# Altium PCB A13-OLinuXino-MICRO_Rev_B_saved.PcbDoc (part 3 of 4)
Units mil, origin at the board's own origin, x right, y up, seen from the top; angles counter-clockwise.
Board outline 3950 x 3350 mil, 4 copper layers (Top, Route2, Route15, Bottom), stack 64.567 mil thick; 262 components, 264 nets, 1099 pads, 476 vias.
Unrouted connection lines stored in the file: 19.
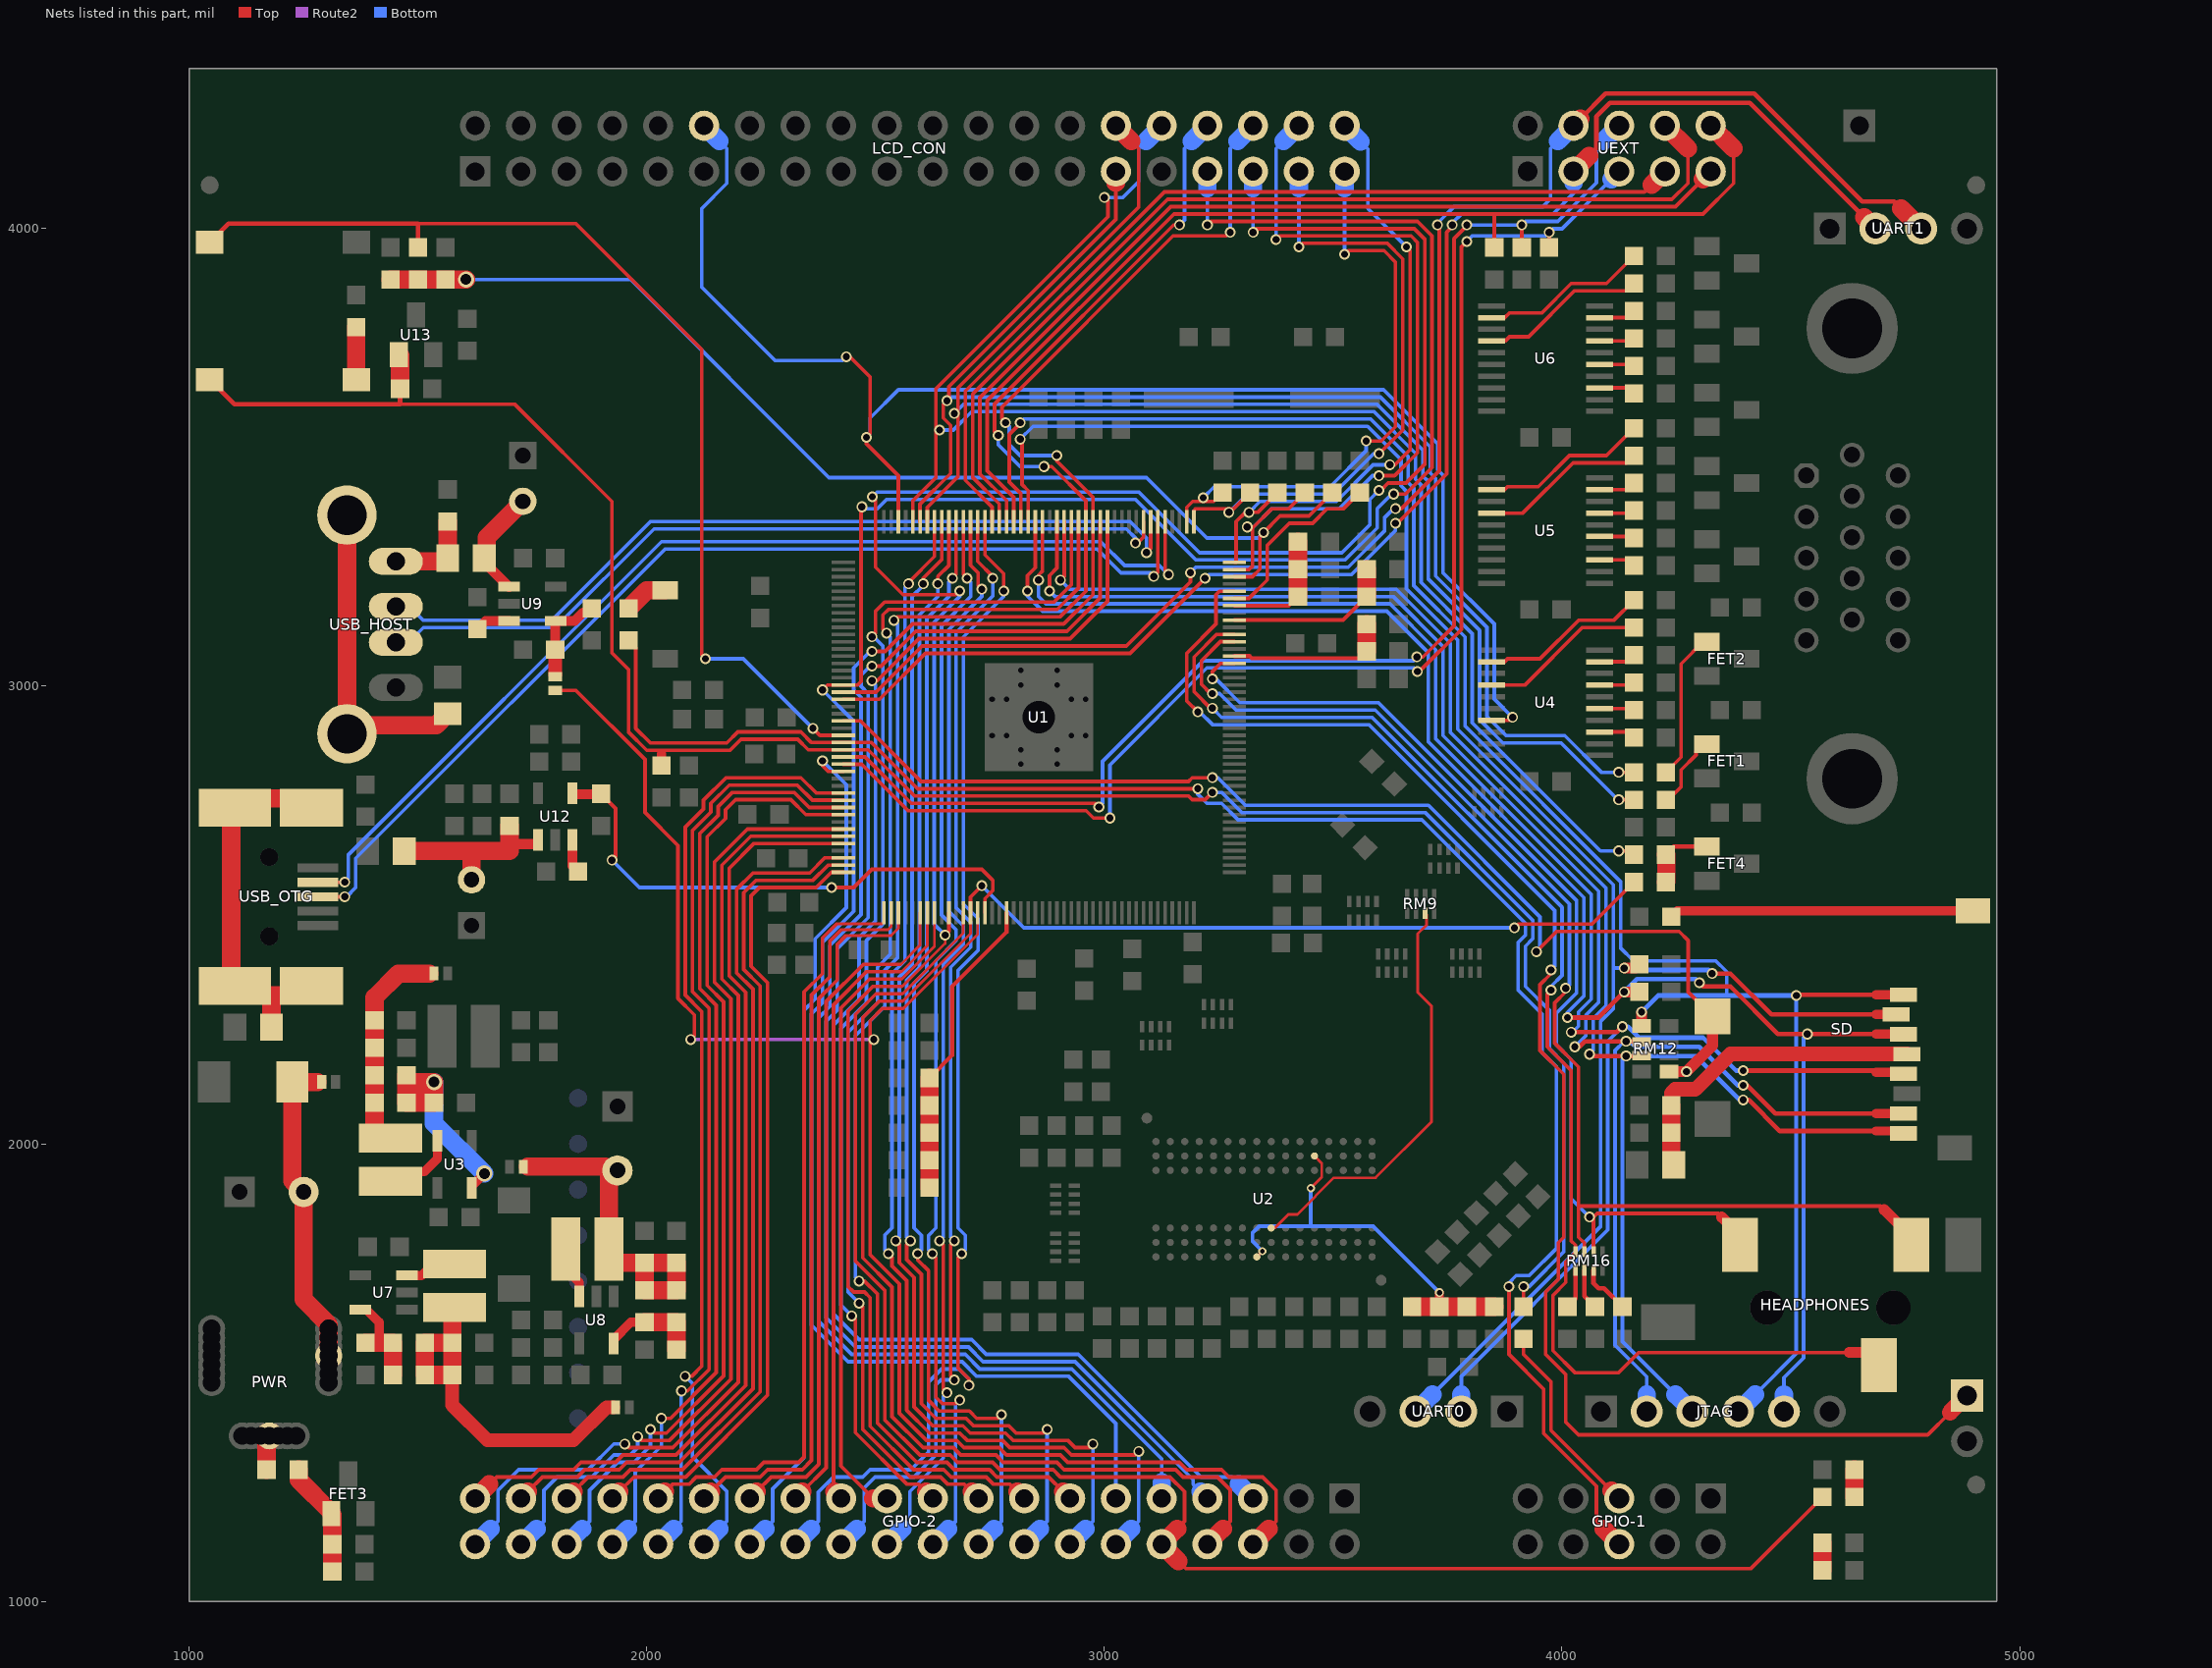
[diagram p5: the nets of this part, all layers, seen from the top]

## Via types
v1: diameter 23.75/23.75/23.75/23.75 (per signal layer), hole 15.75, Top to Bottom, 263 vias
v2: diameter 35.43/31.62/31.62/35.43 (per signal layer), hole 23.62, Top to Bottom, 120 vias
v3: diameter 19.81/19.81/19.81/19.81 (per signal layer), hole 11.81, Top to Bottom, 48 vias
v4: diameter 18/18/18/18 (per signal layer), hole 10, Top to Bottom, 41 vias
v5: diameter 169.92/137.92/137.92/169.92 (per signal layer), hole 129.92, Top to Bottom, 4 vias

## Nets (pads, with @x,y where several pads share a name; then routed paths per layer and width w, separated by ;. In a path a pad name is that pad's centre, name@x,y a point inside that pad or via, vN(x,y) a via of type N, cw(c..) or ccw(c..) an arc to the next point about the centre after c; other vN are vias at no path point) (continued)
LCD_D23: LCD_CON.12 U1.130 U4.17 | length 3276
  Top w8: v1(2436,3720) 2444,3720 2488,3676 2488,3552 v1(2480,3544) 2480,3530 2549.91,3460.09 U1.130@2549.91,3359.17 ; U4.17@3845.89,2925.61 3885.61,2925.61 v1(3892,2932)
  Bottom w8: 2159,4191 2175,4175 2175,4099 2120,4044 2120,3872 2280,3712 2428,3712 v1(2436,3720) ; v1(2480,3544) 2488,3552 2488,3586 2550,3648 3610,3648 3728,3530 3728,3473 3740,3461 3740,3248 3852,3136 3852,2972 v1(3892,2932)
  Bottom w40: LCD_CON.12@2125,4225 2159,4191
LCD_DE: LCD_CON.32 R72.2 U1.128 | length 3336
  Top w8: U1.128@2581.41,3359.17 2581.41,3405.41 2632,3456 v1@2632,3560 ; v1(2640,3560) v1@2632,3560 ; v1(3000,4068) 3008,4060 3008,4026 2632,3650 v1@2632,3560 ; v1(4124,2640) 4149,2640 R72.2@4157,2632
  Bottom w8: v1(2640,3560) 2670,3560 2710,3600 3589,3600 3680,3509 3680,3452 3692,3440 3692,3227 3804,3115 3804,2920 4084,2640 v1(4124,2640) ; v1(3000,4068) 3040,4068 3075,4103 3075,4175 3091,4191
  Bottom w40: 3091,4191 LCD_CON.32@3125,4225
LCD_HSYNC: LCD_CON.29 R6.1 U1.127 | length 3072.7
  Top w8: U1.127@2597.16,3359.17 2597.16,3398.16 2664,3465 2664,3570 2648,3586 2648,3616 v1(2656,3624) 2660,3628 2660,3655 3025,4020 LCD_CON.29@3025,4100 ; v1(4124,2812) R6.1@4157,2812
  Top w40: LCD_CON.29@3025,4100 LCD_CON.29@3025,4125
  Bottom w8: v1(2656,3624) 2664,3632 3603,3632 3712,3523 3712,3466 3724,3454 3724,3241 3836,3129 3836,2934 3878,2892 4006,2892 4086,2812 v1(4124,2812)
LCD_VSYNC: LCD_CON.30 R5.1 U1.126 | length 3209.5
  Top w8: U1.126@2612.91,3359.17 2612.91,3390.91 2680,3458 v1@2680,3596 ; v1(2672,3596) v1@2680,3596 ; 3059,4191 3075,4175 3075,4047 2680,3652 v1@2680,3596 ; v1(4124,2752) R5.1@4157,2752
  Top w40: LCD_CON.30@3025,4225 3059,4191
  Bottom w8: v1(2672,3596) 2692,3616 3596,3616 3696,3516 3696,3459 3708,3447 3708,3234 3820,3122 3820,2927 3871,2876 3998,2876 4122,2752 v1(4124,2752)
LRADC: C64.2 C103.1 R53.2 R55.1 U1.86 | length 2479.2
  Top w8: U1.86@3284.17,3239.09 3323.09,3239.09 3340,3256 3340,3328 v1(3348,3336) 3384,3372 3447,3372 C64.2@3498,3423
  Top w40: C103.1@1440,3889 R55.1@1500,3889 R53.2@1560,3889 v2(1605,3889)
  Bottom w8: v2(1605,3889) 1965,3889 2398,3456 3092,3456 3224,3324 3336,3324 v1(3348,3336)
MICIN1: MIC.1 U1.84 | length 3407.3
  Top w8: v1(3204,2944) 3180,2968 3180,3072 3244,3136 3244,3200 3251.59,3207.59 U1.84@3284.17,3207.59 ; v1(3976,2380) 3976,2372 3952,2348 3952,2204 4004,2152 4004,1796 3992,1784 3992,1704 3964,1676 3964,1540 4008,1496 4008,1392 4036,1364 4799,1364 4848,1413
  Top w36: 4848,1413 MIC.1@4885,1450
  Bottom w8: v1(3204,2944) 3208,2944 3236,2916 3578,2916 3984,2510 3984,2388 v1(3976,2380)
N$1: C62.2 C63.2 U1.75 | length 357.1
  Top w9: U1.75@3284.17,3065.86 3317.14,3065.86 3322,3061 3558,3061 C63.2@3573,3076
  Top w40: C63.2@3573,3076 C62.2@3573,3136
N$2: FET4.1 R72.1 R73.1 | length 158.3
  Top w10: R72.1@4227,2632 4244.4,2649.4 FET4.1@4316.69,2649.4
  Top w40: R73.1@4227,2572 4228,2573 4228,2632 R72.1@4227,2632
N$3: 5V_E.1 C102.+ D8.C PWR.+ | length 695.1
  Top w20: 5V_E.1@1280,2135 5V_E.1@1290,2135
  Top w40: 5V_E.1@1280,2135 D8.C@1225.71,2135 1225.71,1919.29 C102.+@1250,1895 1250,1660 1305,1605 PWR.+@1305,1537.01
N$4: L2.1 U3.3 | length 165.6
  Top w20: L2.1@1440,1917.76 1461.24,1939 1514,1939 1542.6,1967.6 U3.3@1542.6,2006.19 U3.3@1542.6,2010
N$6: R56.1 SD.12 | length 664.2
  Top w20: R56.1@4239,2496 4252.06,2509.06 SD.12@4897.83,2509.06
N$7: C57.2 FET3.1 R43.1 R45.2 | length 253.5
  Top w40: R45.2@1239.19,1287.94 1239.19,1265.81 1310.6,1194.4 FET3.1@1310.6,1191.69 1313,1189.29 R43.1@1313,1125 C57.2@1313,1065
N$8: L4.1 U7.3 | length 114.1
  Top w20: U7.3@1476.19,1712.4 1507.4,1712.4 1532.24,1737.24 L4.1@1580,1737.24
N$9: C36.2 C37.2 U1.80 | length 370.1
  Top w8: U1.80@3284.17,3144.6 3521.6,3144.6 C36.2@3573,3196
  Top w40: C36.2@3573,3196 C37.2@3573,3256
N$10: D1.C R3.2 | length 96.5
  Top w40: R3.2@1960,3170 1999.8,3209.8 D1.C@2040,3209.8
N$11: PWR.-- R45.1 | length 79.8
  Top w40: R45.1@1169.19,1287.94 1169.19,1361.81 PWR.--@1175.08,1361.81
N$12: FET1.1 R5.2 | length 166.3
  Top w8: R5.2@4227,2752 4232,2752 4260,2780 4260,2817 4293,2850 4293,2858 4308.4,2873.4 FET1.1@4316.69,2873.4
N$13: C38.2 U1.83 | length 414.1
  Top w8: U1.83@3284.17,3191.84 3315.84,3191.84 3356,3232 3356,3308 3404,3356 3455,3356 3487,3388 3523,3388 C38.2@3558,3423
N$14: C39.2 C40.2 R4.1 U1.82 | length 267.1
  Top w8: U1.82@3284.17,3176.09 3403.09,3176.09 C40.2@3423,3196
  Top w40: C40.2@3423,3196 C39.2@3423,3256 R4.1@3423,3316
N$15: FET2.1 R6.2 | length 327.4
  Top w8: R6.2@4227,2812 4260,2845 4260,3049 4308.4,3097.4 FET2.1@4316.69,3097.4
N$16: C101.+ L7.2 R57.2 U12.1 | length 419.4
  Top w22: 1700,2655 1762.6,2655 U12.1@1762.6,2663.81
  Top w40: L7.2@1470,2640 1617,2640 ; C101.+@1617,2577 1617,2640 ; R57.2@1700,2695 1700,2655 1700,2640 1617,2640
N$18: 1.5V_E.1 C81.1 C82.1 C83.1 L4.2 R37.1 | length 824.5
  Top w20: 1.5V_E.1@1927,1424 1.5V_E.1@1932,1424
  Top w30: C82.1@1575,1495 1575,1429 1652,1352 1840,1352 1912,1424 1.5V_E.1@1927,1424
  Top w40: L4.2@1580,1642.76 1575,1637.76 C83.1@1575,1565 ; C83.1@1575,1565 C82.1@1575,1495 C81.1@1515,1495 R37.1@1515,1565 C83.1@1575,1565
N$19: C81.2 R37.2 R41.1 U7.5 | length 227.6
  Top w20: U7.5@1373.81,1637.6 1387.4,1637.6 1415,1610 1415,1565
  Top w40: R41.1@1385,1565 1415,1565 R37.2@1445,1565 C81.2@1445,1495
N$20: R33.1 U6.5 | length 76.2
  Top w8: U6.5@4082.11,3703.2 4153.8,3703.2 R33.1@4157,3700
N$22: L6.2 USB_HOST.P$1 USB_HOST.P$2 | length 727.3
  Top w40: USB_HOST.P$2@1345,3373.98 USB_HOST.P$1@1345,2896.02 1345,2915 1540,2915 L6.2@1565,2940
N$23: 1.2V_E.1 C75.1 C76.1 C77.1 L2.2 R17.1 | length 494.3
  Top w20: 1.2V_E.1@1525,2372 1.2V_E.1@1535,2372
  Top w40: L2.2@1440,2012.24 1405,2012.24 R17.1@1405,2090 C75.1@1405,2150 C76.1@1405,2210 C77.1@1405,2270 1405,2320 1457,2372 1.2V_E.1@1525,2372
N$24: HOST_EN.2 R60.2 R61.2 U9.4 | length 212.9
  Top w20: HOST_EN.2@1800,3021 HOST_EN.2@1800,3026
  Top w22: R61.2@1800,3080 1800,3142.6 U9.4@1801.19,3142.6 1842.6,3142.6 1861,3161 1871,3161 R60.2@1880,3170
  Top w30: HOST_EN.2@1800,3026 R61.2@1800,3080
N$26: HEADPHONES.2 RM16.3.2 U1.74 | length 2256
  Top w8: v1(3236,3016) 3236,3032 3254.11,3050.11 U1.74@3284.17,3050.11 ; v1(4060,1840) v1@4068.84,1840 ; RM16.3.2@4068.84,1764.18 v1@4068.84,1840 ; 4349,1840 4341,1848 4076.84,1848 v1@4068.84,1840 ; HEADPHONES.2@4389.13,1779.69 HEADPHONES.2@4389.13,1799.87
  Top w24: 4349,1840 HEADPHONES.2@4389.13,1799.87
  Bottom w8: v1(3236,3016) 3244,3016 3296,2964 3599,2964 4032,2531 4032,2330 3988,2286 3988,2216 4020,2184 4020,1880 v1(4060,1840)
N$27: HEADPHONES.5 RM16.2.2 U1.77 | length 2716.3
  Top w8: v1(3236,2984) 3232,2984 3212,3004 3212,3056 3253.35,3097.35 U1.77@3284.17,3097.35 ; v1(4008,2340) 4008,2332 3984,2308 3984,2220 4036,2168 4036,1864 ; RM16.2.2@4049.16,1764.18 4049.16,1782.84 4036,1796 4036,1864 ; 4704,1856 4696,1864 4036,1864 ; HEADPHONES.5@4763.15,1779.69 HEADPHONES.5@4763.15,1796.85
  Top w24: 4704,1856 HEADPHONES.5@4763.15,1796.85
  Bottom w8: v1(3236,2984) 3252,2984 3288,2948 3592,2948 4016,2524 4016,2348 v1(4008,2340)
N$28: HEADPHONES.3 RM16.1.2 U1.78 | length 2973.8
  Top w8: v1(3236,2952) 3232,2952 3196,2988 3196,3064 3245.1,3113.1 U1.78@3284.17,3113.1 ; v1(3976,2336) 3968,2328 3968,2212 4020,2160 4020,1788 4029.47,1778.53 RM16.1.2@4029.47,1764.18 4029.47,1763.47 4008,1742 4008,1697 3980,1669 3980,1548 4028,1500 4124,1500 4168,1544 4628,1544 ; HEADPHONES.3@4664.19,1544 HEADPHONES.3@4692.28,1515.91
  Top w24: 4628,1544 HEADPHONES.3@4664.19,1544
  Bottom w8: v1(3236,2952) 3256,2932 3585,2932 4000,2517 4000,2368 3976,2344 v1(3976,2336)
N$34: C66.2 RM16.3.1 | length 113
  Top w10: RM16.3.1@4068.84,1723.82 4068.84,1695.16 4080,1684 4092,1684 C66.2@4132,1644
N$35: C67.2 RM16.2.1 | length 89.3
  Top w10: RM16.2.1@4049.16,1723.82 4049.16,1666.84 C67.2@4072,1644
N$36: GPIO-1.5 R13.2 | length 435.6
  Top w8: R13.2@3916,1574 3916,1540 3976,1480 3976,1374 GPIO-1.5@4108,1242
  Top w40: GPIO-1.5@4108,1242 GPIO-1.5@4125,1225
N$37: C56.2 C60.2 R9.1 R12.2 U2.H1 U2.M8 | length 921.6
  Top w5: 3474.8,1934.68 3474.8,1949.9
  Top w6: U2.H1@3333.08,1753.04 v4(3345.28,1765.24) ; v4(3451,1903) 3474.8,1926.8 3474.8,1934.68 ; U2.M8@3459.07,1973.51 3474.8,1957.77 3474.8,1949.9
  Top w20: C60.2@3732,1644 v3(3732,1675)
  Top w40: R12.2@3672,1644 C60.2@3732,1644 C56.2@3792,1644 R9.1@3852,1644
  Bottom w8: v4(3345.28,1765.24) 3324,1786.53 3324,1806 3338,1820 3451,1820 ; v4(3451,1903) 3451,1820 ; v3(3732,1675) 3587,1820 3451,1820
N$38: C75.2 R17.2 R21.1 U3.5 | length 573.2
  Top w20: U3.5@1617.4,1903.81 1617.4,1907.4 v2(1645,1935)
  Top w40: C75.2@1475,2150 C75.2@1475,2135 ; 1475,2110 R17.2@1475,2090 R21.1@1535,2090 1535,2110 ; 1475,2110 C75.2@1475,2135 ; 1475,2110 1535,2110 ; C75.2@1475,2135 v2(1535,2135) 1535,2110
  Bottom w40: v2(1535,2135) 1535,2045 v2(1645,1935)
N$42: LED1.C R51.2 | length 60
  Top w40: LED1.C@4639,1228 R51.2@4639,1288
N$44: C68.2 RM16.1.1 | length 87.1
  Top w10: C68.2@4012,1644 4029.47,1661.47 RM16.1.1@4029.47,1723.82
N$46: R52.1 RESET.P$1 | length 115
  Top w40: RESET.P$1@1365,3670 R52.1@1365,3785
N$64: L5.1 U8.3 | length 116.2
  Top w20: L5.1@1822.76,1770 1822.76,1727.24 1852.6,1697.4 U8.3@1852.6,1666.19
N$65: 3.3V_E.1 C54.+ C89.1 C91.1 C92.1 L5.2 R42.1 | length 749.1
  Top w20: 3.3V_E.1@1730,1950 1740,1950
  Top w40: 1740,1950 1909.24,1950 C54.+@1917.24,1942 ; C54.+@1936,1942 C54.+@1917.24,1942 ; C54.+@1917.24,1942 L5.2@1917.24,1770 1917.24,1740 C91.1@1995,1740 ; C91.1@1995,1740 C92.1@2065,1740 C89.1@2065,1680 R42.1@1995,1680 C91.1@1995,1740
N$66: C89.2 R42.2 R46.1 U8.5 | length 221.8
  Top w20: U8.5@1927.4,1563.81 1927.4,1572.4 1965,1610 R42.2@1995,1610
  Top w40: R42.2@1995,1610 C89.2@2065,1610 R46.1@2065,1550
N$99: R68.2 U12.3 | length 74
  Top w22: U12.3@1837.4,2663.81 1837.4,2607.6 R68.2@1850,2595
N$101: R59.2 U9.3 | length 76.1
  Top w22: R59.2@1630,3125 1647.6,3142.6 U9.3@1698.81,3142.6
N$103: R36.1 U6.3 | length 79.9
  Top w8: U6.3@4082.11,3652.02 4144.98,3652.02 R36.1@4157,3640
N$104: R27.1 U6.9 | length 80.9
  Top w8: U6.9@4082.11,3805.57 4142.57,3805.57 R27.1@4157,3820
N$107: R30.1 U6.7 | length 77.2
  Top w8: U6.7@4082.11,3754.39 4151.39,3754.39 R30.1@4157,3760
N$108: R20.1 U6.14 | length 363.1
  Top w8: U6.14@3845.89,3754.39 3875.39,3754.39 3885,3764 3927,3764 4027,3864 4141,3864 R20.1@4157,3880
N$109: R24.1 U6.12 | length 366.8
  Top w8: U6.12@3845.89,3805.57 3874.57,3805.57 3885,3816 3956,3816 4020,3880 4097,3880 R24.1@4157,3940
N$111: C104.1 L9.2 USB_HOST.1 | length 196.3
  Top w40: USB_HOST.1@1451.69,3272.8 1557.8,3272.8 L9.2@1565,3280 C104.1@1565,3360
N$114: C53.+ L9.1 U9.1 | length 243.7
  Top w22: L9.1@1645,3280 1645,3271.22 U9.1@1698.81,3217.4
  Top w40: L9.1@1645,3280 1650,3285 1650,3325 C53.+@1729,3404
N$117: R26.1 U5.9 | length 80.9
  Top w8: U5.9@4082.11,3429.57 4142.57,3429.57 R26.1@4157,3444
N$118: R29.1 U5.7 | length 77.2
  Top w8: U5.7@4082.11,3378.39 4151.39,3378.39 R29.1@4157,3384
N$129: PWR_LED.A R54.2 | length 60
  Top w40: PWR_LED.A@4569,1068 R54.2@4569,1128
N$138: R32.1 U5.5 | length 76.2
  Top w8: U5.5@4082.11,3327.2 4153.8,3327.2 R32.1@4157,3324
N$172: R35.1 U5.3 | length 79.9
  Top w8: U5.3@4082.11,3276.02 4144.98,3276.02 R35.1@4157,3264
N$173: R19.1 U5.14 | length 363.1
  Top w8: U5.14@3845.89,3378.39 3914.39,3378.39 4024,3488 4141,3488 R19.1@4157,3504
N$174: R23.1 U5.12 | length 366.8
  Top w8: U5.12@3845.89,3429.57 3874.57,3429.57 3881,3436 3948,3436 4016,3504 4097,3504 R23.1@4157,3564
N$177: R25.1 U4.9 | length 80.9
  Top w8: U4.9@4082.11,3053.57 4142.57,3053.57 R25.1@4157,3068
N$178: R28.1 U4.7 | length 77.2
  Top w8: U4.7@4082.11,3002.39 4151.39,3002.39 R28.1@4157,3008
N$179: R31.1 U4.5 | length 76.2
  Top w8: U4.5@4082.11,2951.2 4153.8,2951.2 R31.1@4157,2948
N$180: R34.1 U4.3 | length 79.9
  Top w8: U4.3@4082.11,2900.02 4144.98,2900.02 R34.1@4157,2888
N$181: R18.1 U4.14 | length 363.1
  Top w8: U4.14@3845.89,3002.39 3918.39,3002.39 4044,3128 R18.1@4157,3128
N$182: R22.1 U4.12 | length 366.8
  Top w8: U4.12@3845.89,3053.57 3874.57,3053.57 3881,3060 3952,3060 4036,3144 4113,3144 R22.1@4157,3188
N$266: L8.2 USB_OTG.GND1 USB_OTG.GND2 USB_OTG.GND3 USB_OTG.GND4 | length 891.3
  Top w40: L8.2@1180,2255 1180,2325 ; USB_OTG.GND4@1267.52,2345.12 1267.52,2325 1180,2325 ; USB_OTG.GND2@1267.52,2734.88 1267.52,2755 1100.2,2755 USB_OTG.GND1@1100.2,2734.88 1092,2734.88 1092,2345.12 USB_OTG.GND3@1100.2,2345.12 1100.2,2325 1180,2325
NMI_N: GPIO-1.6 R3.1 U1.158 | length 3903.7
  Top w8: R3.1@1960,3100 1976,3084 1976,2908 2008,2876 2175,2876 2199,2900 2337,2900 2360.12,2876.88 U1.158@2429.83,2876.88 2491.12,2876.88 2592,2776 v1(3204,2776) ; v1(3884,1688) 3884,1540 3960,1464 3960,1367 4075,1252 4075,1175 4091,1159
  Top w40: 4091,1159 GPIO-1.6@4125,1125
  Bottom w8: v1(3204,2776) 3204,2764 3224,2744 3256,2744 3292,2708 3694,2708 3920,2482 3920,2456 3904,2440 3904,2336 3956,2284 3956,2200 3988,2168 3988,1772 3928,1712 3900,1712 3884,1696 v1(3884,1688)
PIN4/TWI0-SCK: GPIO-2.5 U1.101 | length 3269.4
  Top w8: v1(2492,3012) 2503,3012 2595,3104 2925,3104 3006.61,3185.61 U1.101@3006.61,3359.17
  Bottom w8: v1(2492,3012) 2500,3004 2500,2487 2464,2451 2464,2316 2408,2260 2408,1628 2464,1572 2710,1572 2742,1540 2943,1540 3211,1272 3278,1272 3294,1256
  Bottom w40: 3294,1256 GPIO-2.5@3325,1225
PIN5/TWI0-SDA: GPIO-2.7 U1.102 | length 3210.3
  Top w8: v1(2492,3044) 2512,3044 2588,3120 2918,3120 2990.86,3192.86 U1.102@2990.86,3359.17
  Bottom w8: v1(2492,3044) 2488,3044 2468,3024 2468,3000 2484,2984 2484,2494 2416,2426 2416,2292 2392,2268 2392,1620 2456,1556 2703,1556 2735,1524 2936,1524 3194,1266 3194,1256 GPIO-2.7@3210,1240
  Bottom w40: GPIO-2.7@3210,1240 GPIO-2.7@3225,1225
PIN6/PWM0: GPIO-2.9 LCD_CON.36 U1.103 | length 4472.6
  Top w8: v1(2492,3076) 2521,3076 2581,3136 2911,3136 2975.11,3200.11 U1.103@2975.11,3359.17 2975.11,3412.89 2896,3492 v1(2896,3504) ; v1(2784,3576) 2776,3584 2776,3610 3150,3984 3267,3984 v1(3275,3992)
  Bottom w8: v1(2492,3076) 2488,3076 2452,3040 2452,2992 2468,2976 2468,2501 2400,2433 2400,2300 2376,2276 2376,1612 2448,1540 2696,1540 2728,1508 2929,1508 3125,1312 3125,1260 ; v1(2784,3576) 2792,3568 2792,3528 2816,3504 v1(2896,3504) ; v1(3275,3992) 3275,4175 3291,4191
  Bottom w40: GPIO-2.9@3125,1225 3125,1260 ; 3291,4191 LCD_CON.36@3325,4225
PIN7: GPIO-2.11 LCD_CON.33 U1.150 | length 5400.4
  Top w8: v1(2384,2992) 2394.87,3002.87 U1.150@2425.5,3002.87 ; U1.150@2429.83,3002.87 U1.150@2425.5,3002.87 ; v1(2470,3392) 2468,3390 2468,3010 2460.87,3002.87 U1.150@2425.5,3002.87 ; v1(3225,4008) 3233,4016 3684,4016 3716,3984 3716,3478 3658,3420 v1(3632,3420)
  Bottom w8: v1(2384,2992) 2452,2924 2452,2508 2384,2440 2384,2308 2360,2284 2360,1604 2440,1524 2689,1524 2721,1492 2922,1492 3025,1389 GPIO-2.11@3025,1225 ; v1(2470,3392) 2474,3388 2504,3388 2524,3408 3068,3408 3200,3276 3526,3276 3596,3346 3596,3388 3628,3420 v1(3632,3420) ; v1(3225,4008) 3225,4088
  Bottom w40: 3225,4088 LCD_CON.33@3225,4125
PIN8: GPIO-2.13 LCD_CON.34 U1.104 | length 4098.1
  Top w8: v1(2464,1700) 2476,1700 2504,1672 2504,1390 2590,1304 2656,1304 2672,1288 2749,1288 2765,1272 2878,1272 GPIO-2.13@2910,1240 ; v1(2540,3144) 2548,3152 2904,3152 2959.36,3207.36 U1.104@2959.36,3359.17 2959.36,3405.64 2885,3480 v1(2868,3480) ; v1(2768,3548) 2760,3556 2760,3617 3151,4008 v1(3164,4008)
  Top w40: GPIO-2.13@2910,1240 GPIO-2.13@2925,1225
  Bottom w8: v1(2464,1700) 2456,1708 2456,2236 2520,2300 2520,2379 2548,2407 2548,3136 v1(2540,3144) ; v1(2768,3548) 2768,3528 2816,3480 v1(2868,3480) ; v1(3164,4008) 3175,4019 3175,4175 3191,4191
  Bottom w40: 3191,4191 LCD_CON.34@3225,4225
PIN9: GPIO-2.15 LCD_CON.35 U1.10 | length 5231.9
  Top w6: 2556.6,2344 2558,2344 2652,2438 v1(2652,2456)
  Top w8: v1(2493,3414) 2500,3407 2500,3260 2560,3200 2676,3200 v1(2684,3208) ; 2556.6,2344 2494,2344 2440,2290 2440,1688 2452,1676 2476,1676 2488,1664 2488,1383 2583,1288 2649,1288 2665,1272 2742,1272 2758,1256 2794,1256 GPIO-2.15@2810,1240 ; v1(2652,2456) 2660.15,2464.15 U1.10@2660.15,2504.83 ; v1(3325,3992) 3333,4000 3677,4000 3700,3977 3700,3485 3659,3444 3620,3444 3604,3428 v1(3600,3428)
  Top w40: GPIO-2.15@2810,1240 GPIO-2.15@2825,1225
  Bottom w8: v1(2493,3414) 2503,3424 3076,3424 3208,3292 3519,3292 3580,3353 3580,3408 v1(3600,3428) ; v1(2652,2456) 2628,2480 2628,3140 2684,3196 v1(2684,3208) ; v1(3325,3992) 3325,4088
  Bottom w40: 3325,4088 LCD_CON.35@3325,4125
PIN10/TWI1-SCK: GPIO-2.17 U1.105 | length 2750
  Top w8: v1(2464,1652) 2472,1644 2472,1376 2576,1272 2642,1272 2658,1256 2694,1256 GPIO-2.17@2710,1240 ; v1(2524,3116) 2516,3124 2516,3156 2528,3168 2897,3168 2943.61,3214.61 U1.105@2943.61,3359.17
  Top w40: GPIO-2.17@2710,1240 GPIO-2.17@2725,1225
  Bottom w8: v1(2464,1652) 2440,1676 2440,2244 2504,2308 2504,2386 2532,2414 2532,3108 v1(2524,3116)
PIN11/TWI1-SDA: GPIO-2.19 U1.106 | length 2679.7
  Top w8: v1(2448,1624) 2456,1616 2456,1369 2569,1256 2594,1256 GPIO-2.19@2610,1240 ; v1(2492,3108) 2500,3116 2500,3164 2520,3184 2890,3184 2927.87,3221.87 U1.106@2927.87,3359.17
  Top w40: GPIO-2.19@2610,1240 GPIO-2.19@2625,1225
  Bottom w8: v1(2448,1624) 2424,1648 2424,2252 2480,2308 2480,2444 2516,2480 2516,3088 2496,3108 v1(2492,3108)
PIN12/NWE: GPIO-2.21 U1.8 | length 1465
  Top w6: 2555.6,2360 2557,2360 2628.65,2431.65 U1.8@2628.65,2504.83
  Top w8: GPIO-2.21@2495,1225 2424,1296 2424,2297 2487,2360 2555.6,2360
  Top w40: GPIO-2.21@2495,1225 GPIO-2.21@2525,1225
PIN13/NALE: GPIO-2.23 U1.7 | length 1416.3
  Top w6: 2554.6,2376 2556,2376 2612.91,2432.91 U1.7@2612.91,2504.83
  Top w8: GPIO-2.23@2410,1240 2408,1242 2408,2304 2480,2376 2554.6,2376
  Top w40: GPIO-2.23@2410,1240 GPIO-2.23@2425,1225
PIN14/NCLE: GPIO-2.25 U1.6 | length 1440.6
  Top w6: 2553.6,2392 2555,2392 2597.16,2434.16 U1.6@2597.16,2504.83
  Top w8: GPIO-2.25@2340,1240 2392,1292 2392,2311 2473,2392 2553.6,2392
  Top w40: GPIO-2.25@2325,1225 GPIO-2.25@2340,1240
PIN15/NCE1: GPIO-2.27 U1.3 | length 1516.9
  Top w6: 2433.9,2453.9 2435,2455 2534,2455 2549.91,2470.91 U1.3@2549.91,2504.83
  Top w8: GPIO-2.27@2240,1240 2272,1272 2348,1272 2376,1300 2376,2318 2416,2358 2416,2436 2433.9,2453.9
  Top w40: GPIO-2.27@2225,1225 GPIO-2.27@2240,1240
PIN16/NCE0: GPIO-2.29 U1.2 | length 1598.1
  Top w6: 2423.9,2466.9 2425,2468 2527,2468 2534.17,2475.17 U1.2@2534.17,2504.83
  Top w8: GPIO-2.29@2140,1240 2172,1272 2248,1272 2264,1288 2340,1288 2360,1308 2360,2325 2400,2365 2400,2443 2423.9,2466.9
  Top w40: GPIO-2.29@2125,1225 GPIO-2.29@2140,1240
PIN17/NRE: GPIO-2.31 U1.1 | length 1675.8
  Top w6: 2413.9,2479.9 2415,2481 2514,2481 2518.42,2485.42 U1.1@2518.42,2504.83
  Top w8: GPIO-2.31@2040,1240 2056,1256 2092,1256 2108,1272 2148,1272 2164,1288 2240,1288 2256,1304 2332,1304 2344,1316 2344,2332 2384,2372 2384,2450 2413.9,2479.9
  Top w40: GPIO-2.31@2025,1225 GPIO-2.31@2040,1240
PIN18/NRB0: GPIO-2.33 U1.176 | length 1761.7
  Top w8: GPIO-2.33@1940,1240 1972,1272 2085,1272 2264,1451 2264,2352 2228,2388 2228,2542 2246,2560 2370,2560 2403.42,2593.42 U1.176@2429.83,2593.42
  Top w40: GPIO-2.33@1925,1225 GPIO-2.33@1940,1240
PIN19/NRB1: GPIO-2.35 U1.175 | length 1868.2
  Top w8: GPIO-2.35@1840,1240 1872,1272 1948,1272 1964,1288 2078,1288 2248,1458 2248,2345 2212,2381 2212,2549 2239,2576 2363,2576 2396.17,2609.17 U1.175@2429.83,2609.17
  Top w40: GPIO-2.35@1825,1225 GPIO-2.35@1840,1240
PIN20/NDQ0: GPIO-2.37 U1.174 | length 1974.7
  Top w8: GPIO-2.37@1740,1240 1772,1272 1848,1272 1864,1288 1940,1288 1956,1304 2071,1304 2232,1465 2232,2338 2196,2374 2196,2556 2232,2592 2356,2592 2388.91,2624.91 U1.174@2429.83,2624.91
  Top w40: GPIO-2.37@1725,1225 GPIO-2.37@1740,1240
PIN21/NDQ1: GPIO-2.39 U1.172 | length 2110.6
  Top w8: 1656,1256 1672,1272 1748,1272 1764,1288 1840,1288 1856,1304 1932,1304 1948,1320 2064,1320 2216,1472 2216,2331 2180,2367 2180,2602 2234.41,2656.41 U1.172@2429.83,2656.41
  Top w40: GPIO-2.39@1625,1225 1656,1256
PIN22/NDQ2: GPIO-2.40 U1.171 | length 2205
  Top w8: v1(1952,1344) 1960,1336 2057,1336 2200,1479 2200,2324 2164,2360 2164,2609 2227.16,2672.16 U1.171@2429.83,2672.16
  Bottom w8: 1659,1159 1675,1175 1675,1243 1720,1288 1872,1288 1928,1344 v1(1952,1344)
  Bottom w40: GPIO-2.40@1625,1125 1659,1159
PIN23/NDQ3: GPIO-2.38 U1.170 | length 2125.6
  Top w8: v1(1980,1360) 1988,1352 2050,1352 2184,1486 2184,2317 2148,2353 2148,2616 2219.91,2687.91 U1.170@2429.83,2687.91
  Bottom w8: 1759,1159 1775,1175 1775,1243 1804,1272 1880,1272 1928,1320 1964,1320 1980,1336 v1(1980,1360)
  Bottom w40: GPIO-2.38@1725,1125 1759,1159
PIN24/NDQ4: GPIO-2.36 U1.168 | length 2111.9
  Top w8: v1(2008,1376) 2016,1368 2043,1368 2168,1493 2168,2310 2132,2346 2132,2671 2172,2711 2172,2730 2194,2752 2315,2752 2347.6,2719.4 U1.168@2429.83,2719.4
  Bottom w8: 1859,1159 1875,1175 1875,1243 1936,1304 1972,1304 2008,1340 v1(2008,1376)
  Bottom w40: GPIO-2.36@1825,1125 1859,1159
PIN25/NDQ5: GPIO-2.34 U1.167 | length 2049.5
  Top w8: v1(2032,1400) 2052,1400 2152,1500 2152,2303 2116,2339 2116,2678 2156,2718 2156,2737 2187,2768 2322,2768 2354.85,2735.15 U1.167@2429.83,2735.15
  Bottom w8: 1959,1159 1975,1175 1975,1283 2032,1340 v1(2032,1400)
  Bottom w40: GPIO-2.34@1925,1125 1959,1159
PIN26/NDQ6: GPIO-2.32 U1.166 | length 2024.2
  Top w8: v1(2076,1460) 2089,1460 2136,1507 2136,2296 2100,2332 2100,2685 2140,2725 2140,2744 2180,2784 2329,2784 2362.1,2750.9 U1.166@2429.83,2750.9
  Bottom w8: 2059,1159 2075,1175 2075,1459 v1(2076,1460)
  Bottom w40: GPIO-2.32@2025,1125 2059,1159
PIN27/NDQ7: GPIO-2.30 U1.165 | length 2078.9
  Top w8: v1(2084,1492) 2098,1492 2120,1514 2120,2289 2084,2325 2084,2692 2124,2732 2124,2751 2173,2800 2337,2800 2370.35,2766.65 U1.165@2429.83,2766.65
  Bottom w8: v1(2084,1492) 2100,1476 2100,1316 2175,1241 2175,1175 2159,1159
  Bottom w40: GPIO-2.30@2125,1125 2159,1159
PIN28/NDQS: GPIO-2.28 U1.162 | length 1882.8
  Top w8: v1(2384,2837) 2384,2826 2396.11,2813.89 U1.162@2429.83,2813.89
  Bottom w8: 2259,1159 2275,1175 2275,1246 2344,1315 2344,2292 2368,2316 2368,2448 2436,2516 2436,2785 v1(2384,2837)
  Bottom w40: GPIO-2.28@2225,1125 2259,1159
PIN29: GPIO-2.26 U1.118 | length 2683.2
  Top w8: v1(2688,1760) 2680,1752 2680,1510 2704,1486 v1(2704,1472) ; U1.118@2738.89,3359.17 2738.89,3287.11 2780,3246 v1(2780,3208)
  Bottom w8: 2359,1159 2375,1175 2375,1239 2408,1272 2472,1272 2488,1288 2577,1288 2616,1327 2616,1480 2644,1508 2682,1508 2704,1486 v1(2704,1472) ; v1(2688,1760) 2696,1768 2696,1800 2680,1816 2680,2379 2724,2423 2724,2492 2692,2524 2692,3108 2780,3196 v1(2780,3208)
  Bottom w40: GPIO-2.26@2325,1125 2359,1159
PIN30: GPIO-2.24 U1.119 | length 2491.4
  Top w8: v1(2672,1484) 2664,1492 2664,1780 v1(2672,1788) ; U1.119@2723.14,3359.17 2723.14,3272.86 2756,3240 v1(2756,3236)
  Bottom w8: 2459,1159 2475,1175 2475,1248 2499,1272 2584,1272 2632,1320 2632,1473 2643,1484 v1(2672,1484) ; v1(2672,1788) 2664,1796 2664,2386 2708,2430 2708,2484 2676,2516 2676,3117 2756,3197 v1(2756,3236)
  Bottom w40: GPIO-2.24@2425,1125 2459,1159
PIN31: GPIO-2.22 U1.120 | length 2369.9
  Top w8: v1(2640,1788) 2648,1780 2648,1464 v1(2656,1456) ; U1.120@2707.39,3359.17 2707.39,3264.61 2724,3248 2724,3220 v1(2732,3212)
  Bottom w8: 2559,1159 2575,1175 2575,1240 2648,1313 2648,1448 v1(2656,1456) ; v1(2640,1788) 2648,1796 2648,2393 2692,2437 2692,2476 2660,2508 2660,3124 2732,3196 v1(2732,3212)
  Bottom w40: GPIO-2.22@2525,1125 2559,1159
PIN32: GPIO-2.20 U1.121 | length 2391.7
  Top w8: v1(2624,1760) 2632,1752 2632,1446 2646,1432 2676,1432 v1(2684,1440) ; U1.121@2691.65,3359.17 2691.65,3244.35 v1(2700,3236)
  Bottom w8: v1(2624,1760) 2616,1768 2616,1800 2632,1816 2632,2400 2676,2444 2676,2468 2644,2500 2644,3132 2708,3196 2708,3228 v1(2700,3236) ; 2659,1159 2675,1175 2675,1431 v1(2684,1440)
  Bottom w40: GPIO-2.20@2625,1125 2659,1159
PIN33: GPIO-2.18 U1.122 | length 2460.3
  Top w8: v1(2592,1760) 2592,1746.06 2616,1722.06 2616,1439 2639,1416 2705,1416 2721,1400 2767,1400 v1(2775,1408) ; v1(2668,3236) 2675.9,3243.9 U1.122@2675.9,3359.17
  Bottom w8: v1(2592,1760) 2600,1768 2600,1800 2584,1816 2584,2351 2612,2379 2612,3148 2660,3196 2660,3228 v1(2668,3236) ; 2759,1159 2775,1175 v1(2775,1408)
  Bottom w40: GPIO-2.18@2725,1125 2759,1159
PIN34: GPIO-2.16 U1.123 | length 2561.8
  Top w8: v1(2576,1788) 2568,1780 2568,1747 2600,1715 2600,1432 2632,1400 2698,1400 2714,1384 2791,1384 2807,1368 2867,1368 v1(2875,1376) ; v1(2636,3224) 2636,3240 2660.15,3264.15 U1.123@2660.15,3359.17
  Bottom w8: v1(2576,1788) 2568,1796 2568,2358 2596,2386 2596,3156 2636,3196 v1(2636,3224) ; 2859,1159 2875,1175 v1(2875,1376)
  Bottom w40: GPIO-2.16@2825,1125 2859,1159
PIN35: GPIO-2.14 U1.124 | length 2663.2
  Top w8: v1(2544,1788) 2552,1780 2552,1740 2584,1708 2584,1425 2625,1384 2691,1384 2707,1368 2784,1368 2800,1352 2920,1352 2936,1336 2967,1336 v1(2975,1344) ; v1(2604,3224) 2604,3236 2644.4,3276.4 U1.124@2644.4,3359.17
  Bottom w8: v1(2544,1788) 2552,1796 2552,2365 2580,2393 2580,3196 2604,3220 v1(2604,3224) ; 2959,1159 2975,1175 v1(2975,1344)
  Bottom w40: GPIO-2.14@2925,1125 2959,1159
PIN36: GPIO-2.12 U1.125 | length 2780.7
  Top w8: v1(2528,1760) 2536,1752 2536,1733 2568,1701 2568,1418 2618,1368 2684,1368 2700,1352 2777,1352 2793,1336 2912,1336 2928,1320 3067,1320 v1(3075,1328) ; v1(2572,3224) 2572,3227 2628.65,3283.65 U1.125@2628.65,3359.17
  Bottom w8: v1(2528,1760) 2520,1768 2520,1800 2536,1816 2536,2372 2564,2400 2564,3216 v1(2572,3224) ; 3059,1159 3075,1175 v1(3075,1328)
  Bottom w40: GPIO-2.12@3025,1125 3059,1159
PIN37/LED1: GPIO-2.10 LED1.A U1.12 | length 3652.2
  Top w6: 2557.6,2328 2559,2328 2691.65,2460.65 U1.12@2691.65,2504.83
  Top w8: 2557.6,2328 2501,2328 2456,2283 2456,1744 2520,1680 2520,1397 2597,1320 2663,1320 2679,1304 2756,1304 2772,1288 2888,1288 2904,1272 3143,1272 3175,1240 3175,1175 3159,1159 ; 3162,1088 3178,1072 4413,1072 LED1.A@4569,1228
  Top w40: 3159,1159 GPIO-2.10@3125,1125 3162,1088
PIN38/VGA_DIS: GPIO-2.8 R73.2 U1.13 | length 3774.2
  Top w6: 2558.6,2312 2560,2312 2707.39,2459.39 U1.13@2707.39,2504.83
  Top w8: 2558.6,2312 2508,2312 2472,2276 2472,1751 2536,1687 2536,1404 2604,1336 2670,1336 2686,1320 2763,1320 2779,1304 2896,1304 2912,1288 3156,1288 3172,1272 3247,1272 3275,1244 3275,1175 3259,1159 ; U1.13@2707.39,2504.83 2707.39,2539.39 v1(2732,2564) ; v1(3896,2472) 3904,2480 4065,2480 R73.2@4157,2572
  Top w40: GPIO-2.8@3225,1125 3259,1159
  Bottom w8: v1(2732,2564) 2824,2472 v1(3896,2472)
PIN39/USBH_EN: GPIO-2.6 HOST_EN.1 U1.14 | length 3602.6
  Top w6: 2559.6,2296 2561,2296 2723.14,2458.14 U1.14@2723.14,2504.83
  Top w8: HOST_EN.1@1800,2991 1845,2991 1996,2840 1996,2724 2068,2652 2068,2318 2104,2282 2104,2236 v1(2096,2228) ; v1(2496,2228) v1@2488,2228 ; 2559.6,2296 2515,2296 2488,2269 v1@2488,2228 ; 3359,1159 3375,1175 3375,1243 3346,1272 3272,1272 3256,1288 3180,1288 3164,1304 2920,1304 2904,1320 2786,1320 2770,1336 2693,1336 2677,1352 2611,1352 2552,1411 2552,1694 2488,1758 v1@2488,2228
  Top w40: GPIO-2.6@3325,1125 3359,1159
  Route2 w8: v1(2096,2228) v1(2496,2228)
RASN: RM9.2.2 U2.J3 | length 923.9
  Top w6: U2.J3@3364.58,1816.03 3372.03,1816.03 3402,1846 3421.5,1846 3501.3,1925.8 3592.8,1925.8 3715,2048 3715,2301 3685,2331 3685,2459 3704,2478 3704,2500.67 RM9.2.2@3700.84,2503.82
RESET_N: C35.2 R13.1 R50.1 RESET.P$2 U1.159 U13.1 | length 4760.1
  Top w8: 1461,3616 1712,3616 1924,3404 1924,3073 1960,3037 1960,2900 2000,2860 2032,2860 ; 2032,2852 2032,2860 ; v1(3236,2768) 3220,2752 3192,2752 3184,2760 2585,2760 2483.87,2861.13 U1.159@2429.83,2861.13 2352.87,2861.13 2330,2884 2206,2884 2182,2860 2032,2860 ; R13.1@3916,1644 v1(3916,1688)
  Top w10: RESET.P$2@1045,3670 1099,3616 1461,3616 R50.1@1461,3650
  Top w20: C35.2@2032,2827 2032,2852
  Top w40: U13.1@1458.6,3724.69 1461,3722.29 R50.1@1461,3650
  Bottom w8: v1(3236,2768) 3256,2768 3300,2724 3701,2724 3936,2489 3936,2448 3920,2432 3920,2344 3972,2292 3972,2208 4004,2176 4004,1764 3928,1688 v1(3916,1688)
SD0CARD-DETECT: RM12.4.2 SD.10 U1.155 | length 2513.5
  Top w8: U1.155@2429.83,2924.13 2466.87,2924.13 2599,2792 3184,2792 3192,2800 v1(3236,2800) ; v1(3944,2420) 3988,2464 4256,2464 4276,2444 4276,2331.68 SD.10@4328.94,2278.74
  Top w24: RM12.4.2@4234,2158 v1(4272,2158) 4328.94,2214.94 SD.10@4328.94,2278.74
  Bottom w8: v1(3236,2800) 3248,2800 3308,2740 3708,2740 3952,2496 3952,2428 v1(3944,2420)
SD_VCC: C72.2 C73.2 L1.2 SD.4 | length 709.4
  Top w32: C72.2@4239,2084 4239,2111 4247,2119 4291,2119 4368.06,2196.06 SD.4@4754.13,2196.06
  Top w40: C72.2@4239,2084 C73.2@4239,2024 4239,1959 L1.2@4244,1954
SDC0_CMD: JTAG.5 R15.1 SD.3 U1.111 | length 3747.5
  Top w8: v1(2832,3208) 2832,3242 2849.13,3259.13 U1.111@2849.13,3359.17
  Top w10: v1(4012,2276) 4080,2276 v1(4136,2332) ; v1(4300,2352) 4308,2344 4368,2344 4472,2240 v1(4536,2240) 4686,2240 ; SD.3@4745.63,2240 SD.3@4746.26,2239.37
  Top w20: 4686,2240 SD.3@4745.63,2240
  Top w24: v1(4136,2332) R15.1@4169,2332
  Bottom w8: v1(2832,3208) 2832,3197 2865,3164 3617,3164 3708,3073 3708,2878 4048,2538 4048,2323 4012,2287 v1(4012,2276) ; 4485,1452 4485,1489 4528,1532 4528,2232 v1(4536,2240)
  Bottom w10: v1(4136,2332) 4164,2360 4292,2360 v1(4300,2352)
  Bottom w40: JTAG.5@4485,1415 4485,1452
SDC0_DATA0: JTAG.2 RM12.2.1 SD.7 U1.108 | length 3778.3
  Top w8: v1(2880,3208) 2880,3242 2896.37,3258.37 U1.108@2896.37,3359.17
  Top w10: v1(4028,2212) 4038,2212 4050,2224 v1(4140,2224) 4173,2224 RM12.2.1@4174,2223 ; v1(4396,2128) 4404,2128 4465.86,2066.14 4685.86,2066.14
  Top w20: 4685.86,2066.14 SD.7@4746.26,2066.14
  Bottom w8: v1(2880,3208) 2892,3196 3631,3196 3740,3087 3740,2892 4080,2552 4080,2309 4052,2281 4052,2236 v1(4028,2212) ; v1(4140,2224) 4136,2224 4116,2204 4116,1560 4185,1491 4185,1452
  Bottom w10: v1(4140,2224) 4148,2224 4160,2212 4300,2212 4384,2128 v1(4396,2128)
  Bottom w40: JTAG.2@4185,1415 4185,1452
SDC0_DATA1: JTAG.3 RM12.3.1 SD.8 U1.107 | length 3729.5
  Top w8: v1(2904,3232) 2912.12,3240.12 U1.107@2912.12,3359.17
  Top w10: v1(4060,2196) 4064,2192 v1(4140,2192) 4173,2192 RM12.3.1@4174,2193 ; v1(4396,2096) 4408,2096 4476,2028 4686,2028 ; SD.8@4741.09,2028 SD.8@4746.26,2022.83
  Top w20: 4686,2028 SD.8@4741.09,2028
  Bottom w8: v1(2904,3232) 2924,3212 3638,3212 3756,3094 3756,2899 4096,2559 4096,2302 4068,2274 4068,2204 v1(4060,2196) ; v1(4140,2192) 4132,2184 4132,1568 4248,1452
  Bottom w10: v1(4140,2192) 4292,2192 4388,2096 v1(4396,2096)
  Bottom w40: 4248,1452 JTAG.3@4285,1415
SDC0_DATA2: JTAG.4 RM12.1.1 SD.1 U1.113 | length 4274
  Top w8: v1(2816,3576) 2816,3574 2792,3550 2792,3446 2817.63,3420.37 U1.113@2817.63,3359.17
  Top w10: v1(4512,2324) 4513.98,2325.98 4685.98,2325.98
  Top w20: 4685.98,2325.98 SD.1@4746.26,2325.98
  Top w24: RM12.1.1@4174,2258 v1(4174,2288)
  Bottom w8: v1(2816,3576) 2824,3584 3582,3584 3664,3502 3664,3445 3676,3433 3676,3220 3788,3108 3788,2913 4128,2573 4128,2428 4156,2400 4336,2400 4360,2376 4360,2324 ; 4422,1452 4512,1542 v1(4512,2324)
  Bottom w10: v1(4174,2288) 4210,2324 4360,2324 v1(4512,2324)
  Bottom w40: JTAG.4@4385,1415 4422,1452
SDC0_DATA3: R14.1 SD.2 U1.112 UART0.3 | length 4209.8
  Top w8: v1(2816,3540) 2820,3536 2820,3441 2833.38,3427.62 U1.112@2833.38,3359.17
  Top w10: v1(4328,2372) 4368,2372 4457.32,2282.68 4686.32,2282.68
  Top w20: 4686.32,2282.68 SD.2@4730.51,2282.68
  Top w24: v1(4136,2384) 4161,2384 R14.1@4169,2392
  Bottom w8: v1(2816,3540) 2844,3568 3575,3568 3648,3495 3648,3438 3660,3426 3660,3213 3772,3101 3772,2906 4112,2566 4112,2384 ; 3717,1452 4084,1819 4084,2267 4112,2295 4112,2384 ; v1(4136,2384) 4112,2384
  Bottom w10: v1(4136,2384) 4140,2380 4320,2380 v1(4328,2372)
  Bottom w40: UART0.3@3680,1415 3717,1452
SDC0_SCK: SD.5 U1.110 UART0.2 | length 3840.5
  Top w8: v1(2856,3232) 2856,3243 2864.87,3251.87 U1.110@2864.87,3359.17
  Top w10: v1(4020,2244) 4120,2244 v1(4132,2256) ; v1(4396,2160) 4682,2160 4686,2156 ; SD.5@4743.02,2156 SD.5@4746.26,2152.76
  Top w20: 4686,2156 SD.5@4743.02,2156
  Bottom w8: v1(2856,3232) 2856,3196 2872,3180 3624,3180 3724,3080 3724,2885 4064,2545 4064,2316 4036,2288 4036,2257 4023,2244 v1(4020,2244) ; 3780,1452 3780,1492 4100,1812 4100,2224 v1(4132,2256)
  Bottom w10: v1(4132,2256) 4144,2256 4168,2232 4308,2232 4380,2160 v1(4396,2160)
  Bottom w40: UART0.2@3780,1415 3780,1452
SPI2_CLK: U1.115 UEXT.9 | length 2097.5
  Top w8: U1.115@2786.13,3359.17 2786.13,3405.87 2728,3464 2728,3631 3145,4048 4248,4048 UEXT.9@4308,4108
  Top w40: UEXT.9@4308,4108 UEXT.9@4325,4125
SPI2_CS0: R49.1 U1.114 UEXT.10 | length 2336.3
  Top w8: U1.114@2801.88,3359.17 2801.88,3413.12 2744,3471 2744,3624 3152,4032 3852,4032 ; R49.1@3852,3959 3852,4032 ; 4375,4175 4375,4099 4308,4032 3852,4032
  Top w40: UEXT.10@4325,4225 4375,4175
SPI2_MISO: U1.117 UEXT.7 | length 2037.9
  Top w8: U1.117@2754.64,3359.17 2754.64,3391.36 2696,3450 2696,3645 3131,4080 4180,4080 4196,4096
  Top w40: 4196,4096 UEXT.7@4225,4125
SPI2_MOSI: U1.116 UEXT.8 | length 2203.7
  Top w8: U1.116@2770.39,3359.17 2770.39,3398.61 2712,3457 2712,3638 3138,4064 4240,4064 4275,4099 4275,4175
  Top w40: UEXT.8@4225,4225 4275,4175
SVREF: C42.2 C43.2 C59.2 R7.1 R10.2 U1.18 | length 670.5
  Top w9: C43.2@2618,2144 2667,2193 2667,2343.5 2786.13,2462.63 U1.18@2786.13,2504.83
  Top w40: C42.2@2618,1904 R7.1@2618,1964 C59.2@2618,2024 R10.2@2618,2084 C43.2@2618,2144
TPX1: C65.2 LCD_CON.37 U1.89 | length 1409.1
  Top w8: U1.89@3195.58,3359.17 3195.58,3383.58 3200,3388 v1@3272,3388 ; v1(3272,3380) v1@3272,3388 ; C65.2@3318,3423 3283,3388 v1@3272,3388 ; v1(3425,3960) 3433,3968 3618,3968 3652,3934 3652,3560 v1(3600,3508)
  Bottom w8: v1(3272,3380) 3312,3420 3500,3420 3588,3508 v1(3600,3508) ; v1(3425,3960) 3425,4088
  Bottom w40: 3425,4088 LCD_CON.37@3425,4125
TPX2: C70.2 LCD_CON.38 U1.87 | length 1772.2
  Top w8: U1.87@3284.17,3254.83 3315.83,3254.83 3324,3263 3324,3348 ; v1(3312,3348) 3324,3348 ; v1(3375,3976) 3383,3984 3670,3984 3684,3970 3684,3510 3634,3460 v1(3600,3460) ; C70.2@3438,3423 3403,3388 3366,3388 3326,3348 3324,3348
  Bottom w8: v1(3312,3348) 3326,3348 3366,3388 3514,3388 3586,3460 v1(3600,3460) ; v1(3375,3976) 3375,4175 3391,4191
  Bottom w40: 3391,4191 LCD_CON.38@3425,4225
TPY1: C69.2 LCD_CON.39 U1.90 | length 1293.3
  Top w8: U1.90@3179.83,3359.17 3179.83,3390.83 3193,3404 v1@3216,3404 ; v1(3216,3412) v1@3216,3404 ; C69.2@3258,3423 3239,3404 v1@3216,3404 ; v1(3525,3944) 3533,3952 3611,3952 3636,3927 3636,3567 3605,3536 v1(3572,3536)
  Bottom w8: v1(3216,3412) 3240,3436 3493,3436 3572,3515 v1(3572,3536) ; v1(3525,3944) 3525,4088
  Bottom w40: 3525,4088 LCD_CON.39@3525,4125
TPY2: C71.2 LCD_CON.40 U1.88 | length 1385.3
  Top w8: U1.88@3284.17,3270.58 3288,3270.58 3288,3360 3308,3380 v1(3316,3380) 3335,3380 C71.2@3378,3423 ; v1(3624,3484) 3635,3484 3668,3517 3668,3952 v1(3660,3960)
  Bottom w8: v1(3316,3380) 3340,3404 3507,3404 3587,3484 v1(3624,3484) ; 3560,4190 3576,4174 3576,4044 v1(3660,3960)
  Bottom w40: LCD_CON.40@3525,4225 3560,4190
TWI2_SCK: R47.1 U1.161 UEXT.5 | length 2926.5
  Top w8: U1.161@2429.83,2829.64 2469.64,2829.64 2571.28,2728 2960,2728 2976,2712 v1(3012,2712) ; v1(3684,3032) 3688,3032 3780,3124 3780,3960 v1(3792,3972) ; R47.1@3972,3959 v1(3972,3992)
  Bottom w8: v1(3012,2712) 3012,2828 3224,3040 3676,3040 v1(3684,3032) ; v1(3792,3972) 3804,3984 3964,3984 v1(3972,3992) 3980,4000 4000,4000 UEXT.5@4108,4108
  Bottom w40: UEXT.5@4108,4108 UEXT.5@4125,4125
TWI2_SDA: R48.1 U1.160 UEXT.6 | length 3000.8
  Top w8: U1.160@2429.83,2845.39 2476.61,2845.39 2578,2744 2980,2744 v1(2988,2736) ; v1(3683,3064) 3696,3064 3764,3132 3764,3978 3792,4006 v1(3792,4008) ; R48.1@3912,3959 v1(3912,4008)
  Bottom w8: v1(2988,2736) 2996,2744 2996,2836 3216,3056 3675,3056 v1(3683,3064) ; v1(3792,4008) v1(3912,4008) 3920,4016 3991,4016 4075,4100 4075,4175 4091,4191
  Bottom w40: 4091,4191 UEXT.6@4125,4225
UART1_RX: U1.151 UART1.3 UEXT.4 | length 3434.8
  Top w8: U1.151@2429.83,2987.12 2501.12,2987.12 2602,3088 3048,3088 3188,3228 v1(3188,3248) ; v1(3636,3388) 3649,3388 3732,3471 3732,4004 v1(3728,4008)
  Top w10: UEXT.4@4040,4240 4095,4295 4420,4295 4656,4059 4726,4059 4741,4044
  Top w40: UEXT.4@4025,4225 UEXT.4@4040,4240 ; 4741,4044 UART1.3@4785,4000
  Bottom w8: v1(3188,3248) 3200,3260 3533,3260 3612,3339 3612,3368 3632,3388 v1(3636,3388) ; v1(3728,4008) 3728,4012 3764,4048 3958,4048 3975,4065 3975,4175 3991,4191
  Bottom w40: 3991,4191 UEXT.4@4025,4225
UART1_TX: U1.152 UART1.2 UEXT.3 | length 3301.5
  Top w8: U1.152@2429.83,2971.37 2508.37,2971.37 2609,3072 3056,3072 v1(3220,3236) ; v1(3636,3356) 3640,3356 3748,3464 3748,3992 3760,4004 v1(3760,4008)
  Top w10: 4059,4159 4075,4175 4075,4245 4105,4275 4410,4275 4660,4025
  Top w40: UEXT.3@4025,4125 4059,4159 ; 4660,4025 UART1.2@4685,4000
  Bottom w8: v1(3220,3236) 3228,3244 3540,3244 3636,3340 v1(3636,3356) ; v1(3760,4008) 3760,4012 3780,4032 3980,4032 4025,4077 UEXT.3@4025,4100
  Bottom w40: UEXT.3@4025,4100 UEXT.3@4025,4125
UBOOT: R55.2 U1.157 UBOOT.P$2 | length 2308.4
  Top w8: 1500,4011 1845,4011 2120,3736 2120,3068 v1(2128,3060) ; v1(2363,2908) 2378.37,2892.63 U1.157@2429.83,2892.63
  Top w10: UBOOT.P$2@1045,3970 1086,4011 1500,4011 R55.2@1500,3959
  Bottom w8: v1(2128,3060) 2211,3060 v1(2363,2908)
UDM0: U1.93 USB_OTG.D- | length 2345.4
  Top w8: USB_OTG.D-@1281.54,2571.5 1339.5,2571.5 v1(1340,2572) ; U1.93@3132.59,3359.17 3132.59,3251.41 v1(3140,3244)
  Bottom w8: v1(1340,2572) 1348,2580 1348,2632 2032,3316 2992,3316 3044,3264 3120,3264 v1(3140,3244)
UDM1: U1.95 USB_HOST.2 | length 1860.2
  Top w8: v1(3092,3292) 3101.09,3301.09 U1.95@3101.09,3359.17
  Bottom w8: USB_HOST.2@1451.69,3174.37 1481.63,3174.37 1512,3144 1792,3144 2008,3360 3056,3360 3092,3324 v1(3092,3292)
UDP0: U1.94 USB_OTG.D+ | length 2326.4
  Top w8: USB_OTG.D+@1281.54,2540 v1(1340,2540) ; v1(3108,3240) 3116.84,3248.84 U1.94@3116.84,3359.17
  Bottom w8: v1(1340,2540) 1344,2540 1364,2560 1364,2624 2040,3300 2984,3300 3036,3248 3100,3248 v1(3108,3240)
UDP1: U1.96 USB_HOST.3 | length 1794.2
  Top w8: v1(3068,3313) 3072,3313 3085.35,3326.35 U1.96@3085.35,3359.17
  Bottom w8: USB_HOST.3@1451.69,3095.63 1479.63,3095.63 1512,3128 1800,3128 2016,3344 3048,3344 3068,3324 v1(3068,3313)
USB0-DRV: R67.2 U1.15 U12.4 | length 1189
  Top w8: R67.2@1900,2765 1932,2733 1932,2628 v1(1924,2620) ; v1(2404,2560) 2452,2560 2492,2600 2732,2600 2756,2576 2756,2553 2738.89,2535.89 U1.15@2738.89,2504.83
  Top w22: U12.4@1837.4,2766.19 1837.4,2764 1900,2764 R67.2@1900,2765
  Bottom w8: v1(1924,2620) 1984,2560 v1(2404,2560)